# Altium PCB MS-002.25T003末端连接板PCB图 V1.0.PcbDoc
Units mm, origin at the board's own origin, x right, y up, seen from the top; angles counter-clockwise.
Board outline 15 x 19 mm, 2 copper layers (Top Layer, Bottom Layer), stack 1.569 mm thick; 2 components, 5 nets, 15 pads, 18 vias.
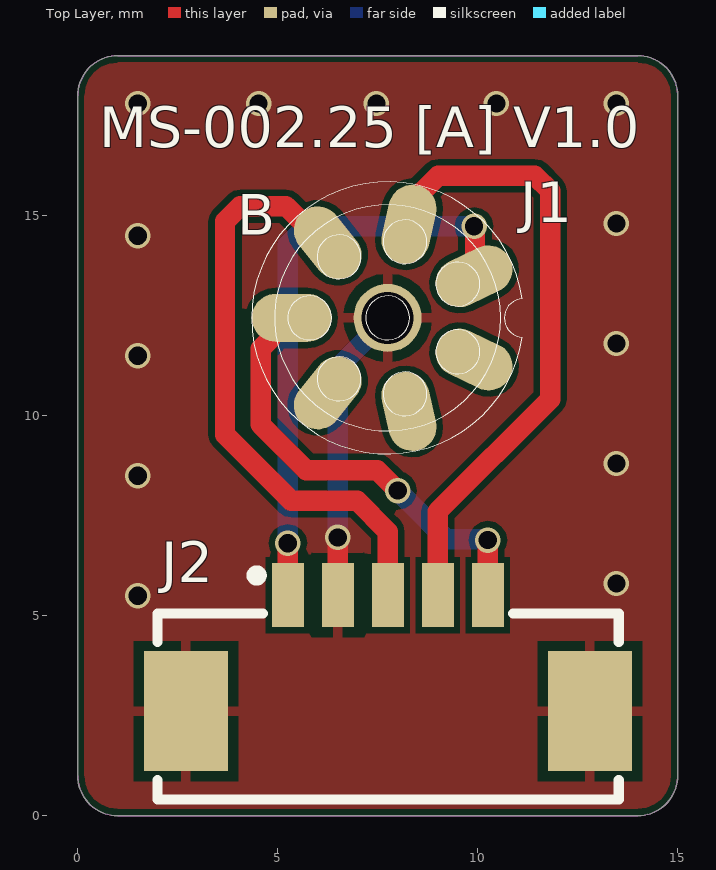
[diagram p0: Top Layer view]
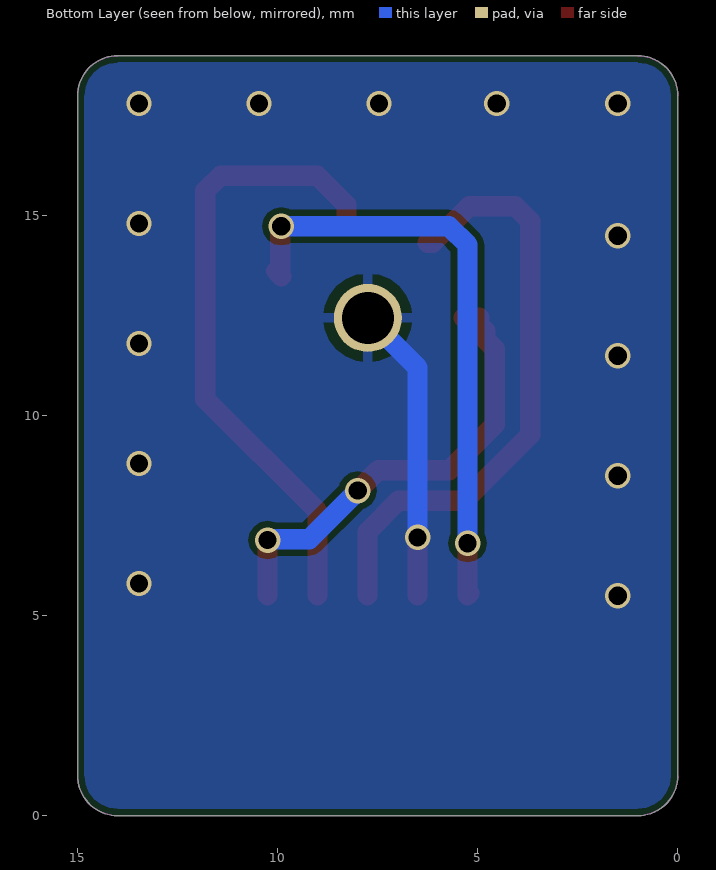
[diagram p1: Bottom Layer view, seen from below]

## Layer stack, top to bottom
Top Solder: solder mask 0.0254, SM-001, Dk 4
Top Layer: signal copper 0.035
Dielectric 1: core 1.4986, Core-043, Dk 4.3
Bottom Layer: signal copper 0.035
Bottom Solder: solder mask 0.0254, SM-001, Dk 4

## Board outline
0,1 ccw(c1,1) 1,0 14,0 ccw(c14,1) 15,1 15,18 ccw(c14,18) 14,19 1,19 ccw(c1,18) 0,18

## Design rules (kind name [scope] priority, off if disabled: settings)
Clearance [All] p1: gap=0.152 ignorepadtopadclearanceinfootprint=FALSE
HoleSize [All] p1: absolutevalues=TRUE maxlimit=100 minlimit=0 maxpercent=80.000 minpercent=20.000
HoleToHoleClearance [All] p1: gap=0 allowstackedmicrovias=TRUE
MinimumSolderMaskSliver [All] p1: minsoldermaskwidth=0
PlaneConnect [All] p1: pad.planeconnectstyle=Relief pad.reliefexpansion=0.508 pad.reliefentries=4 pad.reliefconductorwidth=0.254 pad.reliefairgap=0.254 via.planeconnectstyle=Direct via.reliefexpansion=0.508 via.reliefentries=4 via.reliefconductorwidth=0.254 via.reliefairgap=0.254
PolygonConnect [All] p1: thpad.connectstyle=Relief thpad.reliefconductorwidth=0.254 thpad.reliefentries=4 thpad.polygonreliefangle="90 Angle" thpad.airgapwidth=0.254 smdpad.connectstyle=Relief smdpad.reliefconductorwidth=0.254 smdpad.reliefentries=4 smdpad.polygonreliefangle="90 Angle" smdpad.airgapwidth=0.254 via.connectstyle=Direct via.reliefconductorwidth=0.254 via.reliefentries=4 via.polygonreliefangle="90 Angle" via.airgapwidth=0.254
RoutingVias [All] p1: holewidth=0.457 width=0.635 viastyle="Through Hole" minholewidth=0.457 minwidth=0.635 maxholewidth=0.457 maxwidth=0.635
SilkToSilkClearance [All] p1: silktosilkclearance=0
SilkToSolderMaskClearance [IsPad] p1: minsilkscreentomaskgap=0 clearancetoexposedcopper=TRUE
SolderMaskExpansion [All] p1: expansion=0.102 istentingtop=FALSE
Width [All] p1: maxlimit=1.016 minlimit=0.152 preferedwidth=0.254
24 further rules are at their usual default settings.

## Components (designator, comment, footprint, x,y, rotation, side; value= is the part's Value field where it differs from the comment)
J1 "8PIN" M8_8-coreRP 7.747,12.446 r90 top
J2 "7PIN" 1.25T-5P 7.754,4.064 r0 top

## Footprints (in the part's own frame and the unit in brackets; to place one, negate y for a bottom-side part, rotate by r counter-clockwise, add the part's x,y. Pads: shape width x height; smd on the part's side, far side on the other; paste and mask are expansions set on the pad)
1.25T-5P [mm]
  rect 0.8x1.6 smd: 1(-2.5,1.45) 2(-1.25,1.45) 3(0,1.45) 4(1.25,1.45) 5(2.5,1.45)
  rect 2.1x3 smd: 6(-5.05,-1.45) 7(5.05,-1.45)
  silkscreen extent -5.76,-3.66 5.77,2.07, body extent -5.7,-3.68 5.7,1.51, height 3.4
M8_8-coreRP [mm] "M8_8芯圆形接口"
  oval 1.2x2 smd rot 25.71: 1(1.041,-2.162)
  oval 1.2x2 smd rot 77.14: 2(2.34,-0.534)
  oval 1.2x2 smd rot 128.57: 3(1.876,1.496)
  oval 1.2x2 smd: 4(0,2.4)
  oval 1.2x2 smd rot 51.43: 5(-1.876,1.496)
  oval 1.2x2 smd rot 102.86: 6(-2.34,-0.534)
  oval 1.2x2 smd rot 154.29: 7(-1.041,-2.162)
  round 1.7 hole 1.3: 8(0,0)
  silkscreen extent -3.4,-3.37 3.4,3.4

## Via types
v1: diameter 0.635, hole 0.457, Top Layer to Bottom Layer, tented both sides, 18 vias

## Nets (pads, with @x,y where several pads share a name; then routed paths per layer and width w, separated by ;. In a path a pad name is that pad's centre, name@x,y a point inside that pad or via, vN(x,y) a via of type N, cw(c..) or ccw(c..) an arc to the next point about the centre after c; other vN are vias at no path point)
GND: J1.8 J2.2 J2.6 J2.7 | length 7.4
  Top Layer w0.508: J2.2 v1(6.504,6.958)
  Bottom Layer w0.508: v1(6.504,6.958) 6.504,11.203 J1.8
  other v1: 1.5,5.5 13.468,5.805 1.5,8.5 13.468,8.805 1.5,11.5 13.468,11.805 1.5,14.5 13.468,14.805 1.5,17.805 4.521,17.805 7.468,17.805 10.468,17.805 13.468,17.805
Keyout: J1.1 J2.1 | length 15.1
  Top Layer w0.508: J2.1@5.209,5.559 J2.1 v1(5.254,6.811) ; J1.1 J1.1@9.934,13.512 ; v1(9.909,14.735) 9.934,14.711 J1.1@9.934,13.512 ; J1.1@10.038,13.616 J1.1@9.934,13.512
  Bottom Layer w0.508: v1(5.254,6.811) 5.254,14.271 5.718,14.735 v1(9.909,14.735)
TO0: J1.2 J2.4 | length 15.8
  Top Layer w0.508: J1.2@8.305,14.81 J1.2 8.281,15.274 9.009,16.002 11.43,16.002 11.811,15.621 11.811,10.414 9.004,7.607 J2.4
TO1: J1.3 J2.3 | length 15.3
  Top Layer w0.508: J1.3@6.098,14.475 J1.3 6.127,14.322 5.209,15.24 4.064,15.24 3.683,14.859 3.683,9.525 5.334,7.874 6.985,7.874 7.754,7.105 J2.3
Vin: J1.4 J2.5 | length 11.5
  Top Layer w0.508: J1.4@4.96,12.446 J1.4@5.134,12.446 ; J1.4 J1.4@5.134,12.446 ; v1(8.001,8.128) 7.493,8.636 5.715,8.636 4.572,9.779 4.572,11.671 4.815,11.914 4.815,12.126 J1.4@5.134,12.446 ; J2.5 v1(10.254,6.891)
  Bottom Layer w0.508: v1(8.001,8.128) 9.214,6.915 10.23,6.915 v1(10.254,6.891)
pads on no net: J1.5 J1.6 J1.7

## Polygon pours and split planes (outlines as drawn)
GND on Bottom Layer "GND_L02_P001" (solid, remove dead copper, pour order 1): 0,1 ccw(c1,1) 1,0 14,0 ccw(c14,1) 15,1 15,18 ccw(c14,18) 14,19 1,19 ccw(c1,18) 0,18
GND on Top Layer "GND_L01_P002" (solid, remove dead copper, pour order 2): 0,1 ccw(c1,1) 1,0 14,0 ccw(c14,1) 15,1 15,18 ccw(c14,18) 14,19 1,19 ccw(c1,18) 0,18

## Keep-outs
Keep-Out Layer:
  the board outline again, w0.025

## Silkscreen, mask and mechanical layers (free items; w line width, h text height)
Top Overlay:
  text "MS-002.25 [A] V1.0" at 0.533,16.713 h1.02
  text "B" at 3.988,14.529 h1.02
Mechanical 1:
  the board outline again, w0.025